# Altium PCB TSAL_ControlV1.1.PcbDoc (part 3 of 3)
Units mm, origin at the board's own origin, x right, y up, seen from the top; angles counter-clockwise.
Board outline 110 x 55.6 mm, 4 copper layers (Top Layer, GND, PWR, Bottom Layer), stack 1.488 mm thick; 168 components, 78 nets, 452 pads, 140 vias.
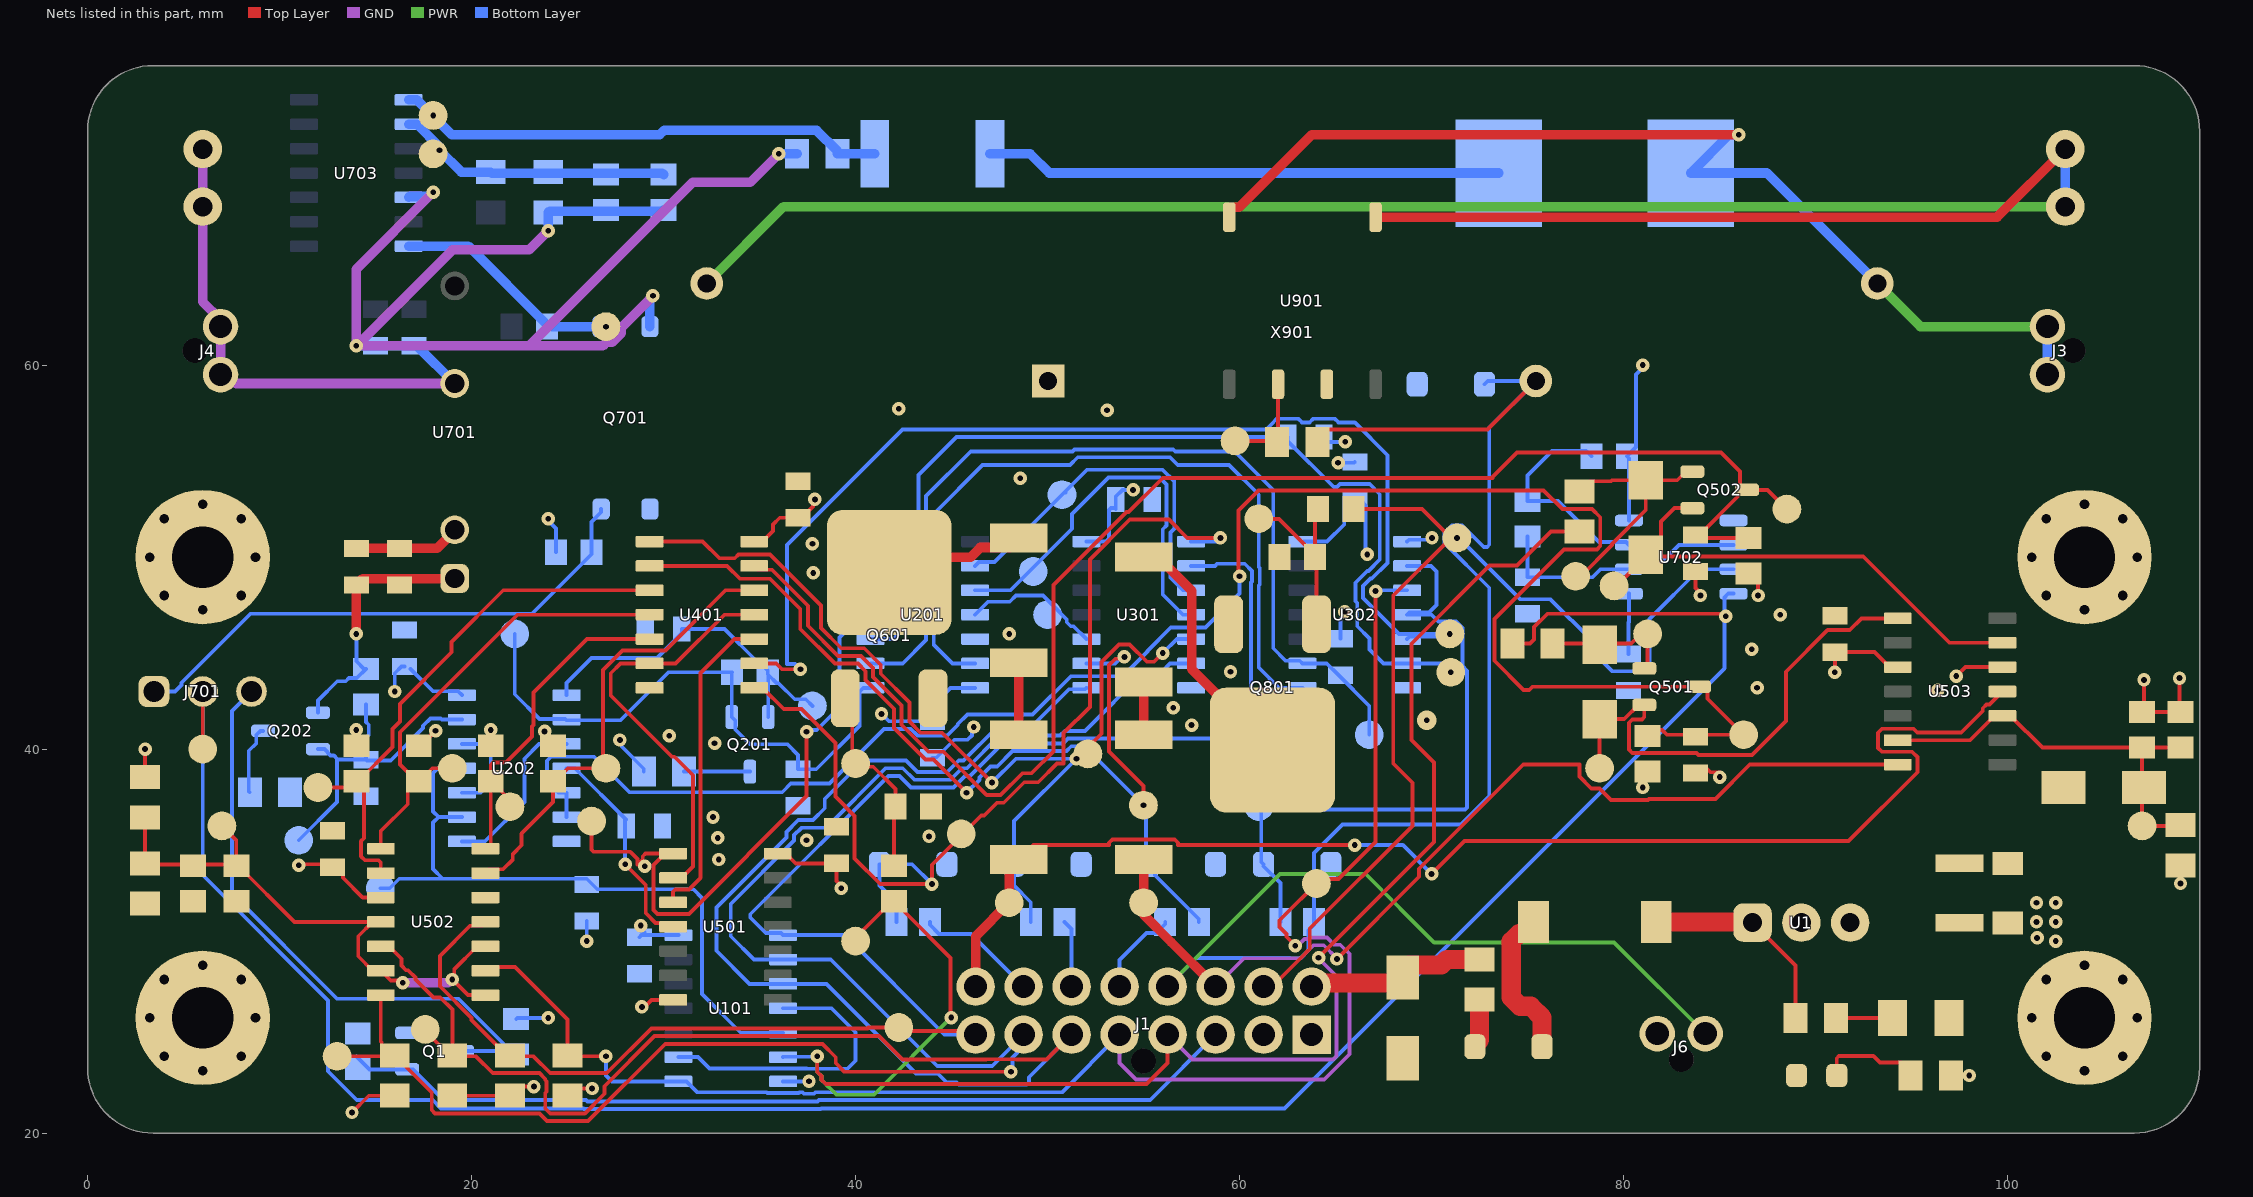
[diagram p4: the nets of this part, all layers, seen from the top]

## Via types
v1: diameter 0.7, hole 0.3, Top Layer to Bottom Layer, tented both sides, 103 vias
v2: diameter 0.7, hole 0.5, Top Layer to Bottom Layer, tented both sides, 32 vias
v3: diameter 1.5, hole 1.5, Top Layer to Bottom Layer, tented both sides, 4 vias
v4: diameter 1, hole 0.3, Top Layer to Bottom Layer, tented both sides, 1 vias

## Nets (pads, with @x,y where several pads share a name; then routed paths per layer and width w, separated by ;. In a path a pad name is that pad's centre, name@x,y a point inside that pad or via, vN(x,y) a via of type N, cw(c..) or ccw(c..) an arc to the next point about the centre after c; other vN are vias at no path point) (continued)
+12: C3.1 C4.1 C101.1 C111.2 C203.1 C204.1 C301.1 C302.1 C401.1 C501.1 C502.1 C503.1 C504.1 C505.1 C703.1 C704.1 J1.7 Q202.G R1.1 R11.1 R202.1 R501.1 R502.1 R503.1 R504.1 R505.1 R511.1 R512.1 R513.1 R702.1 R703.1 U1.3 U101.14 U201.14 U202.14 U301.14 U302.1 U302.14 U401.14 U501.14 U502.3 U503.3 U701.1 U702.8 | length 86.6
  Top Layer w0.2: R505.1@3,38.55 v1(3,40) ; v1(11,33.95) 11.05,34 12.6,34 C504.1@12.75,33.85 12.95,33.85 13.3,33.5 13.3,33.3 14.33,32.27 U502.3@15.275,32.27 ; R502.1@14,40.175 v1(14,41) ; R501.1@17.25,40.175 17.35,40.175 v1(18.125,40.95) ; R503.1@21,40.175 v1(21,41) ; v1(23.803,40.92) 23.803,40.622 R504.1@24.25,40.175 ; U401.14@34.725,50.81 35.15,50.81 35.7,51.36 35.7,51.7 36.05,52.05 C401.1@37,52.05 37.2,52.05 37.786,52.636 37.786,52.906 v1(37.882,53.001) ; U501.14@35.95,34.56 36.375,34.56 36.885,34.05 C503.1@39,34.05 39,33.135 39.25,32.885 v1(39.25,32.75) ; v1(81,38) 81,38.575 R512.1@81.25,38.825 ; C501.1@83.75,38.75 84,39 84.324,39 84.534,38.79 85,38.79 v1(85,38.54) ; C502.1@83.75,49.25 83.75,48.385 84,48.135 v1(84,48) ; R513.1@86.5,49.15 86.525,49.15 87,48.675 v1(87,48) ; v1(91,44) C505.1@91,45.05 93.07,45.05 93.85,44.27 U503.3@94.275,44.27 ; R11.1@97.05,23 v1(98,23) ; v1(109,33) R511.1@109,33.95
  Top Layer w0.5: v1(14,46) C703.1@14,48.55 14.33,48.88 U701.1@19.125,48.88
  Bottom Layer w0.2: Q202.G@12,41.9 12,42.525 13.006,43.531 13.45,43.531 13.619,43.7 14.025,43.7 R202.1@14.5,44.175 14.4,44.175 14,44.575 v1(14,46) ; v1(16,43) 16,43.95 16.35,44.3 C203.1@16.5,44.3 ; C203.1@16.825,44.175 17.99,43.01 19.3,43.01 U202.14@19.5,42.81 ; R1.1@22.325,25.945 22.38,26 v1(24,26) ; v1(24,52) 24,51.881 24.4,51.481 R702.1@24.4,50.25 ; v1(26,30) C111.2@26,31.05 ; C101.1@28.75,30.2 C101.1@28.86,30.31 ; v1(28.808,30.808) 28.808,30.55 28.908,30.45 29,30.45 C101.1@28.86,30.31 ; U101.14@30.775,30.31 C101.1@28.86,30.31 ; v1(41.35,41.834) 41.734,41.45 44.2,41.45 44.55,41.8 44.55,42.8 44.94,43.19 U201.14@46.225,43.19 ; U301.14@52.025,50.81 53.05,50.81 53.2,50.96 53.2,52.45 53.3,52.55 53.55,52.55 53.55,53.15 53.9,53.5 v1(54.45,53.5) ; C302.1@53.55,52.5 C302.1@53.55,53 ; U302.14@63.275,50.81 64.56,50.81 65.45,51.7 65.45,52.7 65.8,53.05 66.2,53.05 66.55,52.7 v1@66.55,50.372 ; U302.1@68.725,50.81 68.82,50.905 69.925,50.905 v1(70.02,51) ; U702.8@80.275,51.905 80.275,55.15 R703.1@80.175,55.25 80.65,55.725 80.65,59.515 81,59.865 v1(81,60) ; v1@66.55,50.372 v1@66.651,50.271 ; v1@66.55,50.372 v1@66.651,50.271 ; v1@66.651,50.271 v1(66.651,50.136) v1@66.651,50.271
  other v1: 102.5,30 101.529,30.169 101.5,31 102.5,31 101.5,32 102.5,32
  other v4: 69.75,41.5
AIR+_Coil: R3.2 TP106.1 U301.1 U401.8 Z1.K | length 53.9
  Top Layer w0.2: U401.8@34.725,43.19 35.15,43.19 36.26,42.08 37.19,42.08 38.95,40.319 38.95,37.524 39.95,36.524 39.95,34.301 41.283,32.968 v1(43.976,32.968) 43.976,33.976 TP106.1@45.542,35.542 ; TP106.1@45.5,35.583 TP106.1@45.541,35.542 ; v1(59,51) 57.273,51 56.323,51.95 54.276,51.95 52.2,49.874 52.2,42.2 50.833,40.833 50.833,39.248 50.492,39.248 49.515,38.271 48.786,38.271 47.719,37.204 47.364,37.204 46.702,36.542 46.542,36.542 TP106.1@45.542,35.542
  Bottom Layer w0.2: Z1.K@41.245,34.005 Z1.K@41.25,34 ; R3.2@42.125,31 42.125,32.025 41.25,32.9 Z1.K@41.25,34 ; v1(43.976,32.968) 42.944,34 Z1.K@41.25,34 ; U301.1@57.475,50.81 58.81,50.81 v1(59,51)
AIR+_Coil_30V: J1.10 R3.1 | length 6.4
  Bottom Layer w0.2: R3.1@43.875,31 43.875,30.85 44.35,30.375 46.006,30.375 J1.10@48.75,27.631
AIR+_Implausibility: TP301.1 U201.9 U301.3 | length 19.2
  Bottom Layer w0.2: U201.9@46.225,49.54 46.425,49.74 47.24,49.74 50.9,53.4 50.928,53.372 50.928,53.428 52.05,54.55 55.99,54.55 56.6,53.94 56.6,51.484 56.4,51.284 56.4,48.92 57.05,48.27 U301.3@57.475,48.27
AIR+_SCS: R504.2 TP506.1 U401.12 U502.13 | length 24.5
  Top Layer w0.2: U502.13@20.725,33.54 20.925,33.74 21.64,33.74 22.15,34.25 22.15,34.54 22.6,34.99 22.6,35.595 24.25,37.245 R504.2@24.25,38.325 24.35,38.325 25.025,39 TP506.1@27,39 26.85,39.15 26.85,44.116 27.864,45.13 30.094,45.13 33.234,48.27 U401.12@34.725,48.27
AIR+_State: J1.1 R519.1 TP102.1 U101.1 U301.2 U502.11 | length 91.5
  Top Layer w0.2: U502.11@20.725,31 20.525,30.8 19.917,30.8 18.35,29.233 18.35,27.65 20,26 20,25.9 21.85,24.05 R519.1@22,24.05 22.05,24 23.226,24 24.101,23.125 27.044,23.125 29.369,25.45 40.619,25.45 40.669,25.5 41.881,25.5 42.25,25.131 42.435,25.315 46.065,25.315 J1.1@46.25,25.131
  Bottom Layer w0.2: J1.1@46.25,25.131 44.619,25.131 39.44,30.31 U101.1@36.225,30.31 36.108,30.427 35.323,30.427 34.517,31.233 34.517,31.398 41.719,38.6 42.294,38.6 42.894,38 45.106,38 45.706,38.6 45.961,38.6 47.661,40.3 50.815,40.3 51.065,40.55 58.55,40.55 60.6,42.6 60.6,48.681 60.65,48.731 60.65,49.269 60.269,49.65 58.82,49.65 58.71,49.54 U301.2@57.475,49.54
AIR-_Coil: R5.2 TP108.1 U301.5 U401.1 Z2.K | length 50.9
  Top Layer w0.2: U401.1@29.275,50.81 32.036,50.81 32.906,49.94 33.706,49.94 33.906,50.14 35.544,50.14 38.2,47.484 38.2,46.302 39.252,45.25 40.45,45.25 41.314,44.386 41.314,43.921 42.8,42.435 42.8,41.431 43.381,40.85 44.504,40.85 v1(47.1,38.254) ; TP108.1@52.1,39.75 52.1,40.1 52.8,40.8 52.8,44.54 53.71,45.45 54.269,45.45 55.169,44.55 55.55,44.55 v1(56,45)
  Bottom Layer w0.2: v1(47.1,38.254) 48.346,39.5 v1(51.5,39.5) 48.25,36.25 Z2.K@48.25,34 48.25,32.9 49.125,32.025 R5.2@49.125,31 ; v1(56,45) 56.73,45.73 U301.5@57.475,45.73
AIR-_Coil_30V: J1.11 R5.1 | length 3.5
  Bottom Layer w0.2: R5.1@50.875,31 51.25,30.625 J1.11@51.25,27.631
AIR-_Implausibility: TP302.1 U201.10 U301.4 | length 20.7
  Bottom Layer w0.2: U201.10@46.225,48.27 48.066,48.27 49.148,49.352 51.274,51.479 51.274,52.249 53.176,54.15 55.824,54.15 56.2,53.774 56.2,51.65 56,51.45 56,48.05 57.05,47 U301.4@57.475,47
AIR-_SCS: R501.2 TP507.1 U401.4 U502.1 | length 24.8
  Top Layer w0.2: U502.1@15.275,34.81 15.275,35.73 16.675,37.13 16.675,37.85 R501.2@17.15,38.325 ; R501.2@17.25,38.325 R501.2@17.15,38.325 ; R501.2@17.35,38.325 17.825,38.8 17.825,38.875 17.95,39 TP507.1@19,39 ; U401.4@29.275,47 22.401,47 16.275,40.874 16.275,39.2 R501.2@17.15,38.325
AIR-_State: J1.2 R516.1 TP104.1 U101.2 U301.6 U502.7 | length 94.8
  Top Layer w0.2: TP104.1@13,24 R516.1@15.85,24 ; U502.7@15.275,27.19 15.275,24.775 15.325,24.725 15.325,24.575 15.85,24.05 R516.1@16,24.05 17.925,22.125 17.925,21.201 18.101,21.025 23.535,21.025 23.935,20.625 26.065,20.625 30.09,24.65 38.269,24.65 38.967,23.952 38.967,23.65 39.425,23.192 48.081,23.192 v1(48.088,23.2)
  Bottom Layer w0.2: v1(48.088,23.2) 48.165,23.276 48.165,23.94 48.406,24.181 J1.2@48.406,24.786 ; J1.2@48.75,25.131 J1.2@48.406,24.786 ; U301.6@57.475,44.46 56.379,44.46 55.919,44 55,44 51.95,40.95 50.899,40.95 50.649,40.7 47.495,40.7 45.795,39 45.54,39 44.94,38.4 43.06,38.4 42.46,39 41.554,39 38.454,35.9 37.181,35.9 36.8,35.519 36.8,35.234 33.5,31.934 33.5,30.25 34.71,29.04 U101.2@36.225,29.04 38.71,29.04 44.25,23.5 47.119,23.5 J1.2@48.406,24.786
Discharge_Resistor: J2.1 J2.2 U901.5 X901.4 | length 112.8
  Top Layer w0.5: U901.5@67.08,67.7 99.45,67.7 J2.2@103,71.25
  PWR w0.5: X901.4@32.25,64.25 36.25,68.25 J2.1@103,68.25
  Bottom Layer w0.5: J2.1@103,68.25 J2.2@103,71.25
GateGREEN_DRV: Q601.G R601.2 R602.1 TP602.1 | length 10.2
  Top Layer w0.2: Q601.G@39.464,42.65 39.825,42.289 TP602.1@39.825,39.25 ; TP602.1@40,39.25 40.167,39.083 40.917,39.083 42.075,37.925 R602.1@42.075,37 42,36.925 R601.2@42,33.925
GateGREEN_SCS: Q502.G R510.1 TP510.1 Z502.K | length 13
  Top Layer w0.2: TP510.1@77.5,49 77.773,49 79.392,50.62 79.392,50.687 81.15,52.444 Z502.K@81.15,54 ; R510.1@77.708,53.425 78.233,53.95 79.341,53.95 79.391,54 Z502.K@81.15,54 ; Q502.G@83.575,54.45 83.241,54.45 82.791,54 Z502.K@81.15,54
GateRED_DRV: Q801.G R801.2 R802.1 TP802.1 | length 9.9
  Top Layer w0.2: TP802.1@61,52 61.025,51.975 62.05,51.975 63.925,50.1 R802.1@63.925,50 ; Q801.G@64,46.5 64,49.925 R802.1@63.925,50 ; R801.2@64.075,52.5 63.925,52.35 R802.1@63.925,50
GateRED_SCS: Q501.G R509.2 TP505.1 Z501.K | length 7
  Top Layer w0.2: R509.2@76.3,45.5 80.398,45.5 80.898,46 TP505.1@81.25,46 81.25,44.375 Q501.G@81.075,44.2
GND: C1.2 C3.2 C4.2 C101.2 C201.2 C202.2 C203.2 C204.2 C223.2 C301.2 C302.2 C333.2 C401.2 C444.2 C503.2 C504.2 C505.2 C555.2 C703.2 C704.2 C705.2 C706.2 D1.2 D3.K D901.A J1.8 J6.1 MH1.1 MH2.1 MH3.1 MH4.1 Q1.S Q601.2 Q701.3 Q801.S R2.2 R203.2 R204.2 R506.2 R507.2 R508.2 R514.2 R515.2 R516.2 R517.2 R518.2 R519.2 R602.2 R802.2 U1.2 U101.7 U201.5 U201.7 U201.12 U202.7 U301.7 U302.7 U401.7 U501.7 U502.12 U503.12 U701.2 U702.1 U901.3 X901.3 Z1.A Z2.A Z3.A Z4.A Z503.A | length 39.6
  Top Layer w0.2: v2(3.25,26) MH1.1@6,26 ; v1(13.775,21.075) 14.65,21.95 R516.2@16,21.95 ; R517.2@19,21.95 R519.2@22,21.95 22.475,22.425 v1(23.25,22.425) ; R518.2@25,21.95 25.375,22.325 v1(26.275,22.325) ; v1(28.875,26.575) 29.01,26.575 29.375,26.94 U501.7@30.5,26.94 ; v1(97.325,43.8) 97.795,44.27 U503.12@99.725,44.27 ; v1(107.1,43.6) 107.1,42.025 R515.2@107,41.925 R514.2@109,41.925 108.95,41.975 v1(108.95,43.7)
  Top Layer w0.5: C703.2@14,50.45 C704.2@16.25,50.45 18.207,50.45 19.125,51.368 U701.2@19.125,51.42 ; MH3.1@104,50 v2(104,52.75)
  Bottom Layer w0.2: v1(27.725,40.475) 27.821,40.379 27.821,40.129 28.971,38.979 R203.2@28.971,38.829 ; U101.7@36.225,22.69 36.23,22.695 37.57,22.695 v1(37.575,22.7) ; C204.2@44,39.55 44.2,39.55 45.137,40.487 45.837,40.487 46.054,40.704 46.054,41.054 v1(46.15,41.15) ; C444.2@64.4,56.25 64.4,56.05 64.45,56 v1(65.5,56) ; v1(65.127,54.912) 65.962,54.912 C301.2@66,54.95 ; C333.2@65.25,45.75 65.25,46.79 65.475,47.015 v1(65.475,47.15)
  other v1: 32.875,34.25 37.45,35.25 32.825,35.375 43.825,35.45 32.575,36.462 32.658,40.3 30.3,40.7 57.5,41.25 56.541,42.15 96.35,43.075 86.95,43.2 59.525,44.025 86.675,45.2 48,46 88.15,47 37.8,49.175 37.75,50.7 48.575,54.1 53.1,57.65 42.25,57.725
  other v2: 6,23.25 104,23.25 4,24 8,24 102,24 106,24 8.75,26 101.25,26 106.75,26 4,28 8,28 102,28 106,28 6,28.75 104,28.75 6,47.25 104,47.25 4,48 8,48 102,48 106,48 3.25,50 8.75,50 101.25,50 106.75,50 4,52 8,52 102,52 106,52 6,52.75
GreenDRV_SCS: C502.2 Q502.D R513.2 TP512.1 U401.13 | length 80.7
  Top Layer w0.2: U401.13@34.725,49.54 34.925,49.34 35.64,49.34 37.515,47.465 37.515,46.421 39.086,44.85 40.284,44.85 40.914,44.22 40.914,43.755 42.4,42.269 42.4,41.266 43.802,39.864 44.57,39.864 46.801,37.633 46.83,37.604 47.553,37.604 48.689,38.74 49.164,38.74 50.3,39.876 50.3,48.54 54.11,52.35 54.219,52.35 55.994,54.125 73.167,54.125 ; 73.167,54.129 73.167,54.167 74.453,55.453 85.062,55.453 86.062,54.453 86.062,53.72 86.221,53.562 Q502.D@86.283,53.5 ; Q502.D@86.425,53.5 Q502.D@86.283,53.5 ; R513.2@86.5,51 83.9,51 C502.2@83.75,51.15 83.95,51.15 85.939,53.139 85.939,53.28 86.159,53.5 Q502.D@86.283,53.5 ; Q502.D@86.5,53.5 87.5,53.5 TP512.1@88.5,52.5
HV_Accu_SCS: R503.2 TP502.1 U401.5 U502.14 | length 18.5
  Top Layer w0.2: U502.14@20.725,34.81 20.8,34.81 21,35.01 R503.2@21,38.325 21,39.183 21.117,39.3 21.799,39.3 23.153,40.654 23.153,41.189 23.225,41.261 23.225,42.948 26.006,45.73 U401.5@29.275,45.73 ; R503.2@21.1,38.325 21.575,37.85 21.575,37.777 22,37.352 TP502.1@22,37
HV_Accumulator: J1.4 R518.1 TP105.1 U101.8 U302.3 U502.9 | length 84.8
  Top Layer w0.2: U502.9@20.725,28.46 20.915,28.65 22.269,28.65 25,25.919 R518.1@25,24.05 25.05,24 v1(27,24) ; v1(62.895,29.761) 62.895,29.778 62.444,30.229 62.444,30.37 62.083,30.731 62.083,31.083 64.231,33.231 65.15,33.231 67.081,35.161 v1(67.081,48.231)
  GND w0.2: J1.4@53.75,25.131 53.75,23.657 54.606,22.8 64.409,22.8 65.719,24.11 65.719,29.338 65.243,29.814 64.919,29.814 64.546,30.188 63.676,30.188 63.602,30.114 63.384,30.114 63.03,29.761 v1(62.895,29.761)
  Bottom Layer w0.2: v1(27,24) 27,23 27.31,22.69 U101.8@30.775,22.69 31.2,22.69 31.765,22.125 35.371,22.125 35.406,22.09 37.044,22.09 37.079,22.125 37.231,22.125 37.306,22.05 37.844,22.05 37.919,22.125 50.744,22.125 J1.4@53.75,25.131 ; v1(67.081,48.231) 67.231,48.231 67.27,48.27 U302.3@68.725,48.27
HV_Detection_DCBus: J701.1 Q701.4 R702.2 | length 28.4
  Bottom Layer w0.2: J701.1@3.46,43 4.56,43 4.9,43.34 4.9,43.456 8.494,47.05 23.15,47.05 26.25,50.15 R702.2@26.25,50.25 26.25,51.832 26.75,52.332 Q701.4@26.75,52.5
HV_Detection_Trigger: J701.2 R509.1 TP703.1 U702.4 | length 125
  Top Layer w0.2: TP703.1@6,40 J701.2@6,43 ; R509.1@74.2,45.5 75.125,45.5 75.338,45.713 75.338,46.362 76.026,47.05 85.053,47.05 85.187,46.916 v1(85.322,46.916)
  Bottom Layer w0.2: J701.2@6,43 6,33.434 12.525,26.909 12.525,23.22 14.02,21.725 17.979,21.725 18.414,21.29 25.825,21.29 25.865,21.25 38.176,21.25 38.216,21.29 62.334,21.29 85.25,44.206 85.25,46.916 85.25,47.899 85.446,48.095 U702.4@85.725,48.095
Implausibilities: C201.1 Q201.S R201.2 TP202.1 U202.1 | length 18.7
  Bottom Layer w0.2: U202.1@24.95,42.81 24.95,43.45 26.25,44.75 29.65,44.75 30.467,45.567 30.95,46.05 C201.1@30.95,46.25 33.175,46.25 34.85,44.575 34.95,44.575 35.425,44.1 R201.2@35.425,44 35.425,43.9 R201.2@35.45,43.875 ; Q201.S@35.45,41.675 R201.2@35.45,43.875 ; TP202.1@37.75,42.25 37.406,42.594 36.831,42.594 36,43.425 35.9,43.425 R201.2@35.45,43.875
Implausibilities_Undelayed: C223.1 Q201.G R201.1 TP201.1 U201.1 U202.2 | length 30.3
  Bottom Layer w0.2: TP201.1@22.25,46 22.25,42.854 23.534,41.57 24.88,41.57 24.95,41.5 27.75,41.5 30.25,44 R201.1@33.575,44 33.55,43.975 Q201.G@33.55,41.675 33.736,41.489 33.736,41.014 34.5,40.25 36.45,40.25 37,39.7 C223.1@37,38.95 37.95,38.95 40.201,41.201 40.201,42.99 40.401,43.19 U201.1@40.775,43.19
INV_HV_Detection: J701.3 Q1.D R1.2 | length 32.1
  Bottom Layer w0.2: J701.3@8.54,43 7.525,41.985 7.525,32.475 13,27 19.32,27 22.225,24.095 R1.2@22.325,24.095 22.15,24.27 Q1.D@19.5,24.27
INV_HV_Detection5V: J1.6 Q1.G R2.1 | length 47.2
  Bottom Layer w0.2: 14,24 14.68,23.32 Q1.G@16.65,23.32 16.95,23.32 18.545,21.725 25.956,21.725 26.031,21.65 38.01,21.65 38.085,21.725 55.344,21.725 J1.6@58.75,25.131
Latch_Reset: C202.1 Q202.S R202.2 TP203.1 U202.13 | length 16.8
  Bottom Layer w0.2: TP203.1@11,35.25 13,37.25 13,39.5 ; Q202.S@12,40 12.334,40 12.662,39.672 12.828,39.672 13,39.5 ; R202.2@14.5,42.325 14.5,41.419 14.65,41.269 14.65,40.731 14.5,40.581 C202.1@14.5,39.45 ; U202.13@19.5,41.54 18.454,41.54 18.394,41.6 17.856,41.6 17.475,41.219 17.475,41.092 15.79,39.407 14.543,39.407 C202.1@14.5,39.45 ; 13,39.5 13.05,39.45 C202.1@14.5,39.45
LV+_in: D1.1 F1.1 J1.16 | length 10
  Top Layer w1: J1.16@63.75,27.631 63.941,27.822 68.222,27.822 D1.1@68.5,28.1 D1.1@68.5,28.4 ; F1.1@72.5,29.05 70.8,29.05 70.5,28.75 D1.1@68.85,28.75 ; D1.1@68.5,28.4 D1.1@68.85,28.75 ; D1.1@68.5,28.4 D1.1@68.85,28.75
NetC1_1: C1.1 R10.2 | length 2.9
  Top Layer w0.2: R10.2@91.05,26 C1.1@94,26
NetC705_1: C705.1 U702.5 | length 3.2
  Bottom Layer w0.2: C705.1@80.25,44.95 80.25,46.587 80.275,46.612 U702.5@80.275,48.095
NetC706_1: C706.1 R706.2 U702.2 U702.6 | length 13.5
  Bottom Layer w0.2: R706.2@75,51.075 C706.1@75,48.95 78.374,48.95 78.789,49.365 U702.6@80.275,49.365 81.615,49.365 82.885,50.635 U702.2@85.725,50.635
NetD2_A: D2.A F1.2 | length 2.6
  Top Layer w1: D2.A@72.25,24.5 72.25,24.6 72.5,24.85 F1.2@72.5,26.95
NetD2_K: D2.K L1.1 | length 8.2
  Top Layer w1: L1.1@75.3,31 75.3,30.7 75,30.4 74.56,30.4 74.15,29.99 74.15,27.06 74.599,26.612 75.164,26.612 75.75,26.026 D2.K@75.75,24.5
NetD3_A: D3.A R11.2 | length 5.3
  Top Layer w0.2: D3.A@91.1,23 91.1,23.9 91.217,24.017 93.003,24.017 93.346,23.675 94.425,23.675 94.95,23.15 R11.2@94.95,23
NetL1_2: L1.2 R10.1 U1.1 | length 10.9
  Top Layer w0.2: U1.1@86.716,30.964 88.95,28.73 R10.1@88.95,26
  Top Layer w1: L1.2@81.7,31 86.68,31 U1.1@86.716,30.964
NetQ201_D: Q201.D R203.1 | length 3.5
  Bottom Layer w0.2: R203.1@31.071,38.829 R203.1@31.141,38.829 ; R203.1@31.141,38.9 31.216,38.825 Q201.D@34.5,38.825
NetQ202_D: Q202.D R204.1 | length 3.6
  Bottom Layer w0.2: R204.1@8.45,37.75 8.4,37.8 8.4,39.912 8.787,40.3 8.787,40.73 9.008,40.95 Q202.D@9.15,40.95
NetQ601_D: Q601.D R604.2 | length 7.5
  Top Layer w0.2: Q601.D@41.75,49.2 Q601.D@42.55,50
  Top Layer w0.5: Q601.D@42.55,50 46,50 46.5,50.5 48,50.5 R604.2@48.5,51
NetQ801_D: Q801.D R804.2 | length 13.3
  Top Layer w0.5: R804.2@55,50 55.75,50 57.5,48.25 57.5,44.164 Q801.D@61.714,39.95
NetR603_2: R603.2 R604.1 | length 3.7
  Top Layer w0.5: R603.2@48.5,40.75 R604.1@48.5,44.5
NetR703_2: R703.2 R706.1 U702.7 | length 11.5
  Bottom Layer w0.2: R703.2@78.325,55.25 78.05,55.525 76.275,55.525 75,54.25 R706.1@75,52.925 76.575,52.925 78.714,50.786 80.124,50.786 U702.7@80.275,50.635
NetR803_2: R803.2 R804.1 | length 2.7
  Top Layer w0.5: R803.2@55,40.75 R804.1@55,43.5
NetR901_2: R901.2 TP901.1 U901.2 | length 5.2
  Top Layer w0.2: TP901.1@59.762,56.05 61.9,56.05 R901.2@61.95,56 62,56.05 U901.2@62,59
NetU101_4: U101.4 U101.9 | length 15.4
  Bottom Layer w0.2: U101.9@30.775,23.96 31.79,23.96 32.39,23.36 37.441,23.36 37.451,23.35 39.583,23.35 40,23.767 40,25.25 38.75,26.5 U101.4@36.225,26.5
No_Voltage_Relays_Closed: C444.1 TP402.1 U201.3 U302.6 | length 50.3
  Bottom Layer w0.2: U201.3@40.775,45.73 41.98,45.73 43.275,47.025 43.275,54.275 45.25,56.25 C444.1@62.5,56.25 62.5,56.05 64.9,53.65 65.076,53.65 65.226,53.8 66.774,53.8 67.3,53.274 67.3,50.25 67.301,50.249 67.301,50.101 67.3,50.1 67.3,49.866 66.715,49.281 66.646,49.281 66.031,48.666 66.031,47.709 66.125,47.615 66.125,46.399 66.761,45.763 66.761,45.191 67.492,44.46 U302.6@68.725,44.46 70.54,44.46 v1(71,44)
Not_Intentional_Relay_State: TP401.1 U302.5 U401.9 | length 59.5
  Top Layer w0.2: U401.9@34.725,44.46 35.872,44.46 36.174,44.158 v1(37.127,44.158)
  Bottom Layer w0.2: v1(37.127,44.158) 36.86,44.425 36.425,44.425 36.425,50.625 42.45,56.65 53,56.65 61.4,56.65 61.75,57 61.75,57.024 61.926,57.2 63.074,57.2 63.25,57.024 63.25,57 63.65,57 63.65,57.024 63.826,57.2 64.974,57.2 65.15,57.024 65.15,57 66,57 67.7,55.3 67.7,50.416 67.701,50.415 67.701,49.935 67.7,49.934 67.7,49.7 66.881,48.881 66.811,48.881 66.431,48.5 66.431,47.875 68.306,46 v1(70.95,46) ; U302.5@68.725,45.73 68.86,45.865 70.2,45.865 70.3,45.965
Not_Safe_State: U202.10 U202.12 | length 4.9
  Bottom Layer w0.2: U202.10@19.5,37.73 20.48,37.73 21,38.25 21,39.75 20.48,40.27 U202.12@19.5,40.27
Out_HV_Comparator: Q701.1 R701.2 TP702.1 U703.14 | length 11.8
  Bottom Layer w0.5: U703.14@16.725,66.19 19.835,66.19 23.925,62.1 R701.2@23.925,62 Q701.1@26.75,62
  other v1: 27,62
Precharge_Coil: R7.2 TP107.1 U301.9 U401.2 Z3.K | length 53.1
  Top Layer w0.2: U401.2@29.275,49.54 33.306,49.54 33.976,48.87 35.544,48.87 37.115,47.299 37.115,46.255 38.92,44.45 40.119,44.45 40.514,44.055 40.514,43.59 42,42.104 42,41.1 43.636,39.464 44.051,39.464 v1(45.782,37.733) ; v1(54,44.8) 53.904,44.704 53.53,44.704 53.2,44.374 53.2,39.876 54.991,38.084 v1(54.991,37.077)
  Bottom Layer w0.2: v1(45.782,37.733) 46.45,38.4 46.45,38.523 47.026,39.1 47.38,39.1 48.18,39.9 50.981,39.9 51.231,40.15 51.919,40.15 v1(54.991,37.077) 55.121,36.948 55.121,34.121 55,34 Z3.K@55.25,34 55.592,33.658 55.592,33.433 57.875,31.15 R7.2@57.875,31 ; U301.9@52.025,44.46 53.525,44.46 53.865,44.8 v1(54,44.8)
Precharge_Coil_30V: J1.12 R7.1 | length 4.6
  Bottom Layer w0.2: J1.12@53.75,27.631 53.75,29.014 55.15,30.414 55.65,30.414 56.125,30.889 R7.1@56.125,31
Precharge_Implausibility: TP303.1 U201.11 U301.10 | length 7.2
  Bottom Layer w0.2: U201.11@46.225,47 46.895,47.67 48.031,47.67 48.361,48 49.755,48 50.378,47.377 51,46.755 51,46.606 51.206,46.4 51.355,46.4 U301.10@52.025,45.73
Precharge_SCS: R502.2 TP509.1 U401.3 U502.2 | length 28.8
  Top Layer w0.2: TP509.1@12,38 13.675,38 R502.2@14,38.325 ; U502.2@15.275,33.54 15.275,34.093 15.158,34.21 14.456,34.21 14.25,34.416 14.25,35.204 14.4,35.354 14.4,37.925 R502.2@14,38.325 ; U401.3@29.275,48.27 21.651,48.27 18.963,45.582 18.963,45.044 16.275,42.356 16.275,41.44 15.875,41.04 15.875,40.1 14.1,38.325 R502.2@14,38.325
Precharge_State: J1.3 R517.1 TP103.1 U101.3 U301.8 U502.5 | length 97
  Top Layer w0.2: U502.5@15.275,29.73 15.7,29.73 16.35,29.08 16.35,28.731 16.595,28.486 16.692,28.486 17.073,28.105 17.073,28.008 18.014,27.067 18.367,27.067 19,26.434 R517.1@19,24.05 ; TP103.1@17.544,25.356 18.85,24.05 R517.1@19,24.05 ; J1.3@51.25,25.131 49.95,23.831 48.377,23.831 48.357,23.85 46.808,23.85 46.788,23.831 42.435,23.831 41.215,25.05 29.535,25.05 26.925,22.44 26.925,22.051 25.899,21.025 24.101,21.025 23.837,21.289 23.837,22.092 23.9,22.156 23.9,22.694 23.837,22.758 23.837,22.823 23.535,23.125 21.101,23.125 20.226,24 19.05,24 R517.1@19,24.05
  Bottom Layer w0.2: J1.3@51.25,25.131 49.031,22.912 49.031,22.642 48.914,22.525 45.394,22.525 45.269,22.65 44.731,22.65 44.281,23.1 43.15,23.1 38.48,27.77 U101.3@36.225,27.77 34.48,27.77 32.75,29.5 32.75,31.75 36.4,35.4 36.4,35.685 37.015,36.3 37.774,36.3 38.397,36.922 38.397,37.397 40.4,39.4 42.626,39.4 43.226,38.8 44.774,38.8 45.374,39.4 45.629,39.4 47.329,41.1 49.1,41.1 51.117,43.117 51.952,43.117 U301.8@52.025,43.19
RedDRV_SCS: C501.2 Q501.D R512.2 TP508.1 U202.5 U202.6 | length 100.3
  Top Layer w0.2: v1(60,49) 59.95,49.05 59.95,52.435 60.99,53.475 75.833,53.475 76.808,52.5 78.357,52.5 78.783,52.074 78.783,50.576 78.607,50.4 76.9,50.4 73.275,46.775 73.275,44.601 74.793,43.083 75.083,43.083 75.25,43.25 Q501.D@83.925,43.25 84.155,43.25 84.375,43.03 84.375,42.625 TP508.1@86.25,40.75 83.75,40.75 82.25,40.75 82,41 81.575,41 R512.2@81.25,40.675
  Bottom Layer w0.2: U202.6@24.95,36.46 U202.5@24.95,37.73 24.525,37.73 23.925,38.33 23.925,39.394 24.131,39.6 26.376,39.6 28.221,37.754 36.18,37.754 36.626,38.2 38.634,38.2 41.484,41.05 42.876,41.05 43.226,40.7 44.774,40.7 45.324,41.25 45.324,41.3 45.824,41.8 49.216,41.8 51.206,43.79 53.909,43.79 55.195,45.076 55.195,45.114 56.411,46.33 58.224,46.33 60,48.106 v1(60,49)
Relays_Implausibility: C333.1 TP305.1 U201.2 U302.9 | length 46.8
  Bottom Layer w0.2: U201.2@40.775,44.46 42.46,44.46 43.675,45.675 43.675,53.175 46,55.5 51.303,55.5 51.403,55.6 56.546,55.6 56.646,55.5 59.75,55.5 61.75,53.5 61.75,45.25 62.398,44.602 63.133,44.602 U302.9@63.275,44.46 64.54,44.46 65.15,43.85 66.75,42.25 TP305.1@66.75,40.75
Relays_State_Detection: TP304.1 U201.13 U302.8 | length 42.5
  Bottom Layer w0.2: U201.13@46.225,44.46 45.04,44.46 44.075,45.425 44.075,52.258 46.617,54.8 51.169,54.8 51.569,55.2 56.38,55.2 56.78,54.8 59.45,54.8 61,53.25 61,49.485 61.05,49.435 61.05,48.565 61,48.515 61,44.25 62.06,43.19 U302.8@63.275,43.19 63.25,43.165 TP304.1@63.25,40.75
Safe_State: C111.1 TP204.1 U101.5 U202.9 U202.11 | length 36.2
  Bottom Layer w0.2: TP204.1@15.25,32.75 15.737,32.75 16.237,33.25 18.5,33.25 ; U202.9@19.5,36.46 18.29,36.46 ; U202.11@19.5,39 18.25,39 18,38.75 18,36.75 18.29,36.46 ; U101.5@36.225,25.23 34.02,25.23 32,27.25 32,32.25 31.55,32.7 26.55,32.7 26,33.25 19.5,33.25 18.5,33.25 ; 18.29,36.46 18,36.17 18,33.75 18.5,33.25
Safe_State_Unlatched: U202.3 U202.8 | length 8.9
  Bottom Layer w0.2: U202.8@19.5,35.19 20.69,35.19 22.75,37.25 22.75,39.5 23.52,40.27 U202.3@24.95,40.27
SC_End: R9.2 TP109.1 U302.2 U302.4 Z4.K | length 34.9
  Bottom Layer w0.2: TP109.1@61,37 61.151,36.849 71.732,36.849 71.849,36.966 71.849,44.071 71.6,44.319 71.6,46.319 71.269,46.65 70.35,46.65 70,47 U302.4@68.725,47 68.847,47.122 69.872,47.122 70.25,47.5 70.25,49.25 69.96,49.54 U302.2@68.725,49.54 ; TP109.1@61.125,36.875 61.125,34.125 Z4.K@61.25,34 ; Z4.K@61.25,33.9 62.125,33.025 R9.2@62.125,31
SC_End_30V: D901.K J1.13 J6.2 R9.1 R901.1 X901.2 | length 100.3
  Top Layer w0.2: R901.1@64.05,56 64.05,56.125 64.575,56.65 72.91,56.65 X901.2@75.43,59.17
  PWR w0.2: J1.13@56.25,27.631 62.108,33.489 66.568,33.489 70.133,29.925 79.505,29.925 J6.2@84.25,25.18
  Bottom Layer w0.2: J1.13@56.25,27.631 57.742,29.122 62.614,29.122 62.626,29.111 63.164,29.111 63.176,29.122 63.192,29.122 63.573,29.503 63.573,30.548 63.875,30.85 63.875,34.588 65.357,36.07 71.518,36.07 73,37.551 73,48.4 70.67,50.731 70.67,51.269 71.05,51.65 71.589,51.65 72.717,50.522 72.883,50.522 73,50.639 73,56.74 X901.2@75.43,59.17 72.92,59.17 D901.K@72.75,59
SCS_Error: TP511.1 U201.4 U501.1 | length 32.1
  Top Layer w0.2: TP511.1@26.25,36.25 26.25,34.767 26.367,34.65 28.269,34.65 28.65,34.269 28.65,33.978 ; v1(29.014,33.905) 28.941,33.978 28.65,33.978 ; U501.1@30.5,34.56 U501.1@30.075,34.56 ; v1(37.45,40.9) 37.45,37.551 31.319,31.42 29.681,31.42 29.475,31.626 29.475,33.96 U501.1@30.075,34.56 ; 28.65,33.978 28.653,33.978 28.919,34.243 28.919,34.419 29.06,34.56 U501.1@30.075,34.56
  Bottom Layer w0.2: v1(37.45,40.9) 37.546,40.996 37.981,40.996 39.167,42.183 39.167,45.817 40.35,47 U201.4@40.775,47
SCS_Signals1: U401.6 U401.11 U501.2 | length 21.9
  Top Layer w0.2: U501.2@30.5,33.29 30.925,33.29 31.525,33.89 31.525,38.635 30.561,39.599 30.446,39.599 27.25,42.796 27.25,43.951 27.759,44.46 30.63,44.46 33.17,47 U401.11@34.725,47
SCS_Signals2: U401.10 U501.3 | length 16.5
  Top Layer w0.2: U501.3@30.5,32.02 30.5,32.573 30.617,32.69 31.319,32.69 31.925,33.296 31.925,43.955 33.7,45.73 U401.10@34.725,45.73
SCS_Signals3: C555.1 U202.4 U501.4 | length 11.3
  Top Layer w0.2: v1(28,34) 29.075,32.925 29.075,31.46 29.585,30.95 30.3,30.95 U501.4@30.5,30.75
  Bottom Layer w0.2: U202.4@24.95,39 25.375,39 28.05,36.325 28,36.275 v1(28,34)
SourceGREEN_SCS: Q502.S TP513.1 U503.13 Z502.A | length 27
  Top Layer w0.2: Q502.S@83.575,52.55 82.65,52.55 81.95,51.85 81.95,50.92 Z502.A@81.15,50.12 ; U503.13@99.725,45.54 96.964,45.54 92.479,50.025 81.245,50.025 Z502.A@81.15,50.12 ; TP513.1@79.63,48.5 TP513.1@79.5,48.5 TP513.1@79.63,48.5 ; TP513.1@79.63,48.5 81.15,50.02 Z502.A@81.15,50.12
SourceRED_SCS: Q501.S TP503.1 U503.1 Z501.A | length 26.7
  Top Layer w0.2: TP503.1@78.75,39 Z501.A@78.75,41.56 80.035,41.56 80.775,42.3 Q501.S@81.075,42.3 81.075,41.675 80.95,41.55 80.451,41.55 80.275,41.374 80.275,39.976 80.451,39.8 83.792,39.8 83.892,39.7 86.685,39.7 88.455,41.47 88.455,44.03 90.626,46.2 91.774,46.2 92.384,46.81 U503.1@94.275,46.81
TS+_DCBus1: F3.1 R705.1 | length 26.9
  Bottom Layer w0.5: R705.1@47,71 49.096,71 50.096,70 F3.1@73.5,70
TS+_DCBus1_Unfused: F3.2 J3.1 J3.2 U901.6 X901.1 | length 56.3
  Top Layer w0.5: U901.6@59.46,67.7 59.46,68.15 59.535,68.225 59.985,68.225 63.76,72 v1(86,72)
  PWR w0.5: X901.1@93.21,64.25 95.46,62 J3.2@102.07,62
  Bottom Layer w0.5: v1(86,72) 85.5,72 F3.2@83.5,70 87.46,70 X901.1@93.21,64.25 ; J3.1@102.07,59.5 J3.2@102.07,62
TS-: C701.2 C702.2 J4.1 J4.2 J5.1 J5.2 Q701.2 R707.2 R708.2 R709.2 R710.2 U701.3 U703.12 | length 97.4
  GND w0.5: J5.1@6,71.25 J5.2@6,68.25 6,63.295 6.93,62.365 J4.1@6.93,62 J4.2@6.93,59.5 7.295,59.5 7.755,59.04 U701.3@19.125,59.04 ; v1(18,69) 14,65 v1(14,61) ; v1(24,67) 23,66 19,66 v1(14,61) ; v1(29.446,63.607) 27.8,61.96 27.8,61.669 27.331,61.2 27.04,61.2 26.84,61 23,61 ; v1(36,71) 34.514,69.514 31.514,69.514 23,61 ; v1(14,61) 23,61
  Bottom Layer w0.5: v1(14,61) C701.2@15,61 17.165,61 U701.3@19.125,59.04 ; U703.12@16.725,68.73 16.775,68.78 17.726,68.78 17.946,69 v1(18,69) ; v1(24,67) R708.2@24,67.95 24.062,68.012 29.937,68.012 R710.2@30,68.075 ; Q701.2@29.29,62 29.29,63.45 v1(29.446,63.607) ; v1(36,71) R707.2@36.95,71
TS_Off: J1.5 R510.2 R601.1 TP101.1 U101.6 | length 88.9
  Top Layer w0.2: v1(38,24) 38,23.194 38.225,22.969 38.225,22.775 38.45,22.55 55.144,22.55 56.25,23.656 J1.5@56.25,25.131 ; TP101.1@40,30 40,30.175 41.9,32.075 R601.1@42,32.075 ; R601.1@42.1,32.075 42.575,31.6 42.575,31.5 44.95,29.125 44.95,26.043 v1(44.978,26.016) ; v1(64.111,29.138) 70.127,35.154 70.127,39.294 68.95,40.471 68.95,45.485 73.02,49.555 74.455,49.555 76.225,51.325 R510.2@77.708,51.325
  GND w0.2: J1.5@56.25,25.131 57.55,23.831 64.874,23.831 65.05,24.006 65.05,28.169 64.111,29.108 v1(64.111,29.138)
  PWR w0.2: v1(38,24) 38,23.194 38.225,22.969 38.225,22.775 39,22 40.962,22 v1(44.978,26.016)
  Bottom Layer w0.2: U101.6@36.225,23.96 36.245,23.98 37.98,23.98 v1(38,24)
TS_On: J1.15 R801.1 TP701.1 U702.3 | length 55.8
  Top Layer w0.2: J1.15@61.25,27.631 61.7,27.631 63.461,29.391 63.461,29.407 63.65,29.597 63.65,30.65 69,36 69,38.25 68,39.25 68,48 TP701.1@71,51 ; R801.1@65.925,52.5 69.5,52.5 TP701.1@71,51 ; v1(71.32,51) TP701.1@71,51
  Bottom Layer w0.2: v1(71.32,51) 71.426,51 74.626,47.8 76.2,47.8 78.351,45.649 78.351,45.113 79.414,44.05 81.086,44.05 81.35,44.314 81.35,46.776 83.939,49.365 U702.3@85.725,49.365
TSAL_Green: J1.9 R603.1 TP601.1 U503.11 | length 69.3
  Top Layer w0.2: R603.1@48.5,34.25 49.25,35 53.2,35 53.2,35.124 53.376,35.3 56.624,35.3 56.8,35.124 56.8,35 v1(66,35) ; v1(70,33.5) 71.71,35.21 91.715,35.21 95.3,38.796 95.3,39.584 95.024,39.86 93.456,39.86 93.25,40.066 93.25,40.854 93.456,41.06 95.094,41.06 95.294,40.86 97.585,40.86 98.7,41.975 98.7,42.124 98.906,42.33 99.055,42.33 U503.11@99.725,43
  Top Layer w0.5: J1.9@46.25,27.631 46.25,30.25 TP601.1@48,32 48,33.75 R603.1@48.5,34.25
  Bottom Layer w0.2: v1(66,35) 68.5,35 v1(70,33.5)
TSAL_Red: J1.14 R803.1 TP801.1 U503.7 | length 51.2
  Top Layer w0.2: v1(65.069,29.069) 69.35,33.35 69.35,33.769 74.771,39.19 77.7,39.19 77.7,38.565 78.315,37.95 78.75,37.95 79.35,37.35 81.269,37.35 81.319,37.4 84.779,37.4 86.569,39.19 U503.7@94.275,39.19
  Top Layer w0.5: R803.1@55,34.25 TP801.1@55,32 55,31.381 56.44,29.94 J1.14@58.75,27.631
  GND w0.2: J1.14@58.75,27.631 60.23,29.111 63.164,29.111 63.841,29.788 64.38,29.788 65.069,29.099 v1(65.069,29.069)
V_REF: R505.2 R506.1 R507.1 R508.1 TP501.1 U502.4 U502.6 U502.8 U502.10 | length 31.2
  Top Layer w0.2: R505.2@3,36.45 R506.1@3,34.05 3.062,33.988 7.687,33.988 R508.1@7.75,33.925 ; TP501.1@7,36 7,35.995 7.75,35.245 R508.1@7.75,33.925 ; v1(16.423,27.836) 16.342,27.755 16.157,27.94 15.795,27.94 U502.6@15.275,28.46 14.85,28.46 14.1,29.21 14.1,30.25 14.85,31 U502.4@15.275,31 10.775,31 7.85,33.925 R508.1@7.75,33.925 ; U502.8@20.725,27.19 19.81,27.19 v1(19,28) 19.096,28.096 19.096,28.526 20.3,29.73 U502.10@20.725,29.73
  GND w0.5: v1(16.423,27.836) 18.782,27.836 18.946,28 v1(19,28)
V_REF_Drivers: R511.2 R514.1 R515.1 TP504.1 U503.6 U503.10 Z503.K | length 22.1
  Top Layer w0.2: U503.6@94.275,40.46 98.03,40.46 99.3,41.73 U503.10@99.725,41.73 100.15,41.73 101.805,40.075 R515.1@107,40.075 ; R511.2@109,36.05 108.95,36 TP504.1@107,36 107,37.9 Z503.K@107.1,38 107,38.1 R515.1@107,40.075 ; R514.1@109,40.075 R515.1@107,40.075
Voltage_DCBus1: R705.2 R707.1 TP705.1 U703.8 | length 25.7
  Bottom Layer w0.5: U703.8@16.725,73.81 17.15,73.81 17.96,73 v1(18,73) 18,72.96 18.96,72 29.801,72 30.026,72.225 37.975,72.225 39.05,71.15 R707.1@39.05,71 R705.2@41,71
VREF_HV_Detection: R704.2 R708.1 R709.1 R710.1 TP704.1 U703.9 | length 14.5
  Bottom Layer w0.5: U703.9@16.725,72.54 17.15,72.54 18.337,71.352 v1(18.337,71.188) 19.475,70.05 R704.2@21,70.05 21.063,69.987 29.937,69.987 R710.1@30,69.925
pads on no net: J1.A J3. J4. J6. U101.10 U101.11 U101.12 U101.13 U201.6 U201.8 U301.11 U301.12 U301.13 U302.10 U302.11 U302.12 U302.13 U501.5 U501.6 U501.8 U501.9 U501.10 U501.11 U501.12 U501.13 U503.2 U503.4 U503.5 U503.8 U503.9 U503.14 U703.1 U703.2 U703.4 U703.5 U703.6 U703.7 U703.10 U703.11 U703.13 U901.1 U901.4
copper on no net:
  other v3: 101.1,65.1 7.9,65.3 101.1,74.2 7.9,74.4

## Polygon pours and split planes (outlines as drawn)
GND on Top Layer "GND_L01_P015" (solid, pour order 15): 0,23.414 0,72 0,72.186 cw(c3.414,72.186) 3.414,75.6 106.502,75.6 106.586,75.6 cw(c106.586,72.186) 110,72.186 110,72 110,23.414 cw(c106.586,23.414) 106.586,20 106.5,20 3.414,20 cw(c3.414,23.414)
+12 on Top Layer "+12_L01_P005" (solid, pour order 5): 92.321,33.071 92.124,33.071 ccw(c92.124,31.558) 90.61,31.558 90.61,30.781 ccw(c92.321,30.781) 92.321,29.071 102,29.071 ccw(c102,31.037) 103.966,31.037 ccw(c102,31.037) 102,33.003 95.3,33.05
GND on Bottom Layer "GND_L04_P006" (solid, pour order 6): 0,23.414 0,72 0,72.186 cw(c3.414,72.186) 3.414,75.6 106.5,75.6 106.586,75.6 cw(c106.586,72.186) 110,72.186 110,72 110,23.414 cw(c106.586,23.414) 106.586,20 106.5,20 3.414,20 cw(c3.414,23.414)
GND on GND "GND_L02_P007" (solid, pour order 7): 3.414,20 cw(c3.414,23.414) 0,23.414 0,72 0,72.186 cw(c3.414,72.186) 3.414,75.6 106.5,75.6 106.586,75.6 cw(c106.586,72.186) 110,72.186 110,72 110,23.414 cw(c106.586,23.414) 106.586,20 106.5,20
+12 on PWR "+12_L03_P008" (solid, pour order 8): 3.414,20 cw(c3.414,23.414) 0,23.414 0,72 0,72.186 cw(c3.414,72.186) 3.414,75.6 106.5,75.6 106.586,75.6 cw(c106.586,72.186) 110,72.186 110,72 110,23.414 cw(c106.586,23.414) 106.586,20 106.5,20

## Other copper
Top Layer:
  pour cut-out: 0,75.5 0,53.5 28,53.5 35.5,61 88.75,61 96.25,53.5 110,53.5 110,75.5
GND:
  pour cut-out: 110,53.75 96,53.75 88.75,61 35.5,61 28.25,53.75 0,53.75 0,75.5 110,75.5
PWR:
  pour cut-out: 110,53.609 96,53.609 88.75,60.859 35.5,60.859 28.25,53.609 0,53.609 0,75.359 110,75.359
  pour cut-out: 18.081,49.52 18.242,49.718 18.625,49.718 19.698,49.718 20.258,49.158 20.258,47.762 19.728,47.233 18.272,47.233 17.773,47.732 17.773,49.212
  pour cut-out: 85.295,43.95 85.978,43.95 86.625,43.303 86.625,42.097 86.063,41.535 84.857,41.535 84.21,42.182 84.21,43.218 84.942,43.95
Bottom Layer:
  pour cut-out: 110,53.75 96,53.75 88.75,61 35.5,61 28.25,53.75 0,53.75 0,75.5 110,75.5

## Silkscreen, mask and mechanical layers (free items; w line width, h text height)
Top Overlay:
  lines w0.25: 0.25,53.75 28.25,53.75 35.5,61 88.75,61 96,53.75 110.25,53.75 ; 0.25,57.75 26.5,57.75 33.75,65 90.25,65 97.5,57.75 110.25,57.75 ; 0.5,64.5 10.75,64.5 ; 5.5,54.25 6,53.75 ; 5.5,57.25 5.93,57.68 ; 6,54.75 6,57.61 ; 6,57.36 6.07,57.43 ; 6,57.75 6,53.75 ; 6.07,57.68 6.5,57.25 ; 6.5,54.25 6,53.75 ; 10.75,57.75 10.75,75.25 ; 55,61.5 55.5,61 ; 55,64.5 55.43,64.93 ; 55.5,65 55.5,61 ; 55.57,64.93 56,64.5 ; 56,61.5 55.5,61 ; 99.75,57.75 99.75,75 ; 99.75,64.25 109.5,64.25 ; 105,54.25 105.5,53.75 ; 105,57.25 105.43,57.68 105.5,57.68 105.57,57.68 106,57.25 ; 105.5,57.75 105.5,53.75 ; 106,54.25 105.5,53.75 ; 105.5,53.75 105.5,53.75
  text "Discharge Relay" at 61.5,74.229 h1.3
  text "R_Dsch-" at 1.142,73.25 h1.3 r270
  text "R_Dsch+" at 107.142,72 h1.3 r270
  text "TS" at 17.5,69.512 h1.3
  text "TS" at 91.5,66.262 h1.3
  text "TS-" at 0.762,62 h1.3 r270
  text "TS+" at 107.512,62 h1.3 r270
  text "4 mm" at 55,61.751 h1.3 r90
  text "4 mm" at 104.75,54.501 h1.3 r90
  text "4 mm" at 5.5,54.251 h1.3 r90
  text "LV" at 26,50 h1.3
  text "GND" at 79.238,21.001 h1.3 r90
  text "SC END" at 87.738,21.001 h1.3 r90
Bottom Overlay:
  drawing of 31 lines, arcs and shapes, not listed
  text "TS" at 49.511,68.671 h1.3
  text "4 mm" at 54.75,64.499 h1.3 r90
  text "TS" at 99.75,61.012 h1.3
  text "TS" at 13,59.012 h1.3
  text "4 mm" at 104.75,57.499 h1.3 r90
  text "4 mm" at 5.25,56.999 h1.3 r90
  text "LV" at 87.75,56.75 h1.3
  text "TSAL CONTROL 2025" at 108.75,41.512 h1.3
  text "Guillem Ropero" at 108.749,39.725 h1.3
  text "LV" at 20.75,23 h1.3
Mechanical 1:
  lines w1: 0,72 0,23.414 ccw(c3.414,23.414) 3.414,20 106.5,20 ; 0,72.186 cw(c3.414,72.186) 3.414,75.6 106.5,75.6 ; 106.586,20 ccw(c106.586,23.414) 110,23.414 110,72 ; 106.586,75.6 cw(c106.586,72.186) 110,72.186

## Text inside footprints (layer, text, board x,y; h text height)
U901: Top Overlay "6.35mm" at 64.96,61 h1.3 r90